# EAGLE board 00A-050 (EAGLE 6.3)
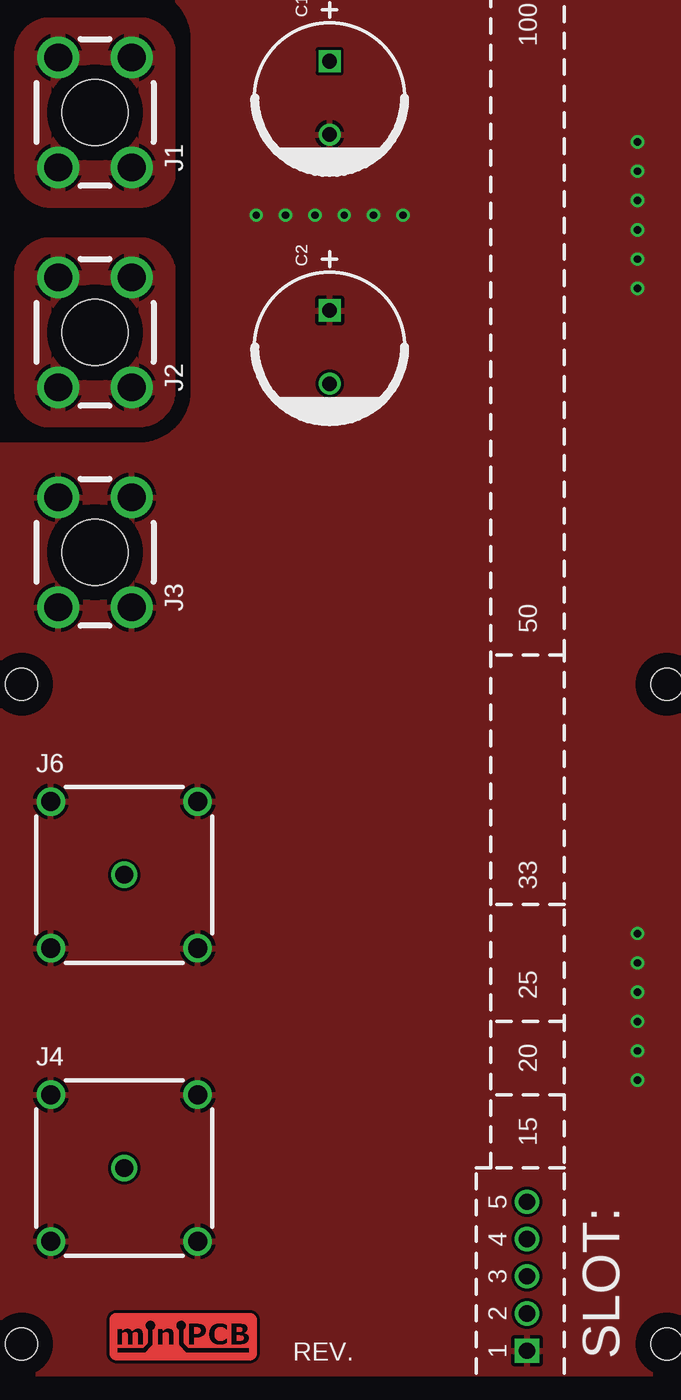
[diagram p0: board, top side]
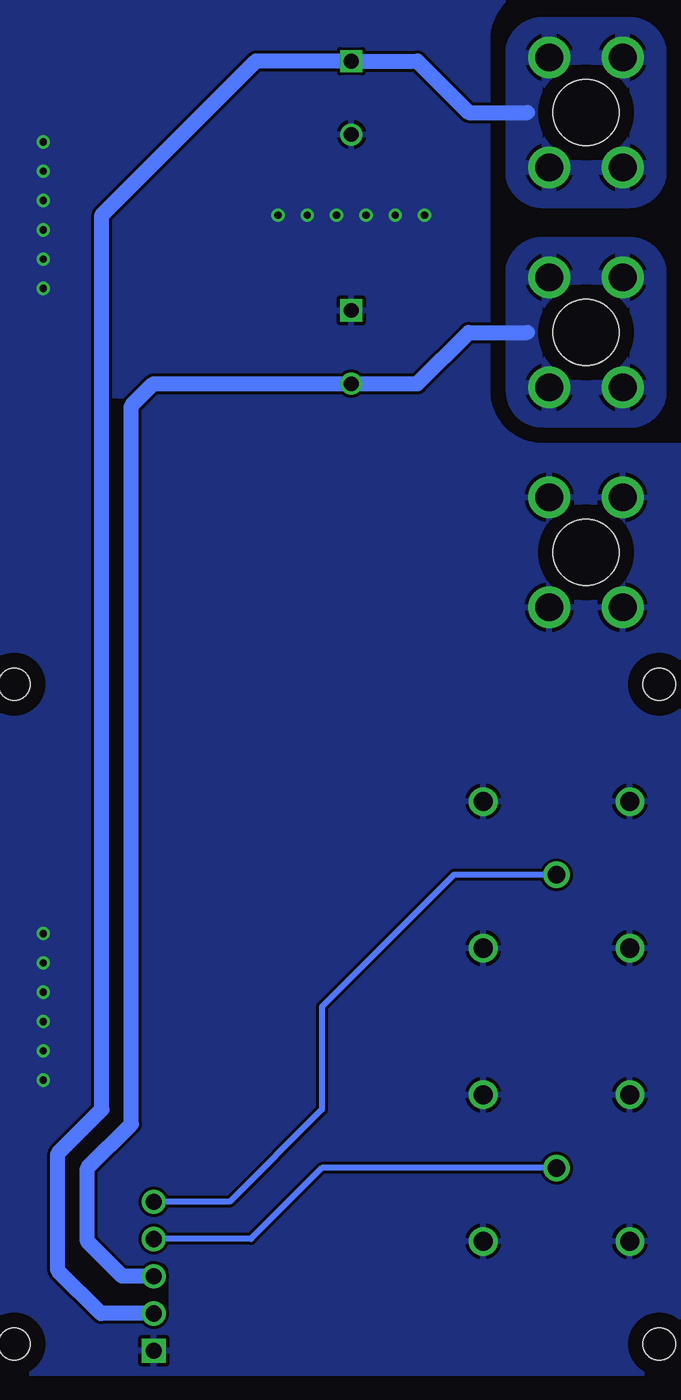
[diagram p1: board, bottom side, seen from below]

No outline drawn. Coordinates in mm, seen from the top.
Copper layers (1*16): Top 0.035mm / dielectric 1.5mm / Bottom 0.035mm
Design rules "default": minimum track width 10mil, minimum drill 24mil, track to track 8mil, track to pad 8mil, pad to pad 8mil, via to via 8mil, smd to smd 8mil, copper to edge 40mil, drill to drill 8mil, minimum pad ring 10mil, minimum via ring 8mil, stop-mask expansion 4mil, vias tented up to drill 0mil, thermal gap 10mil
Holes 4.5 mm at 8,87 8,72 8,57
tRestrict: 5 lines
bRestrict: 7 lines

## Footprints (pad centres in the part's own frame; a part is rotated, then mirrored left to right if it is on the bottom)
C5MM = drill 1 square: + -2.5,0 | drill 1: - 2.5,0
SCREW-TERMINAL-M3 = drill 1.9: 1 -2.5,3.75; 2 2.5,3.75; 3 -2.5,-3.75; 4 2.5,-3.75
B35N14H = drill 1.2: 1.SIG 0,0 | drill 1.3: 2.GND 5,5; 3.GND 5,-5; 4.GND -5,-5; 5.GND -5,5
MINIPCB_DOCK_5P = drill 1.1 square: 1 2.54,2.54 | drill 1.1: 2 5.08,2.54; 3 7.62,2.54; 4 10.16,2.54; 5 12.7,2.54
MINIPCB_DOCK_50X100 = hole 2.2: 3,97; 3,48; 3,3; 47,3; 47,48; 47,97

## Placement (x,y rotation side)
C1  [C5MM]  24,88 270 top
C2  [C5MM]  24,71 270 top
J1  +V  [SCREW-TERMINAL-M3]  8,87 0 top
J2  -V  [SCREW-TERMINAL-M3]  8,72 0 top
J3  GND  [SCREW-TERMINAL-M3]  8,57 0 top
J4  IN.A  [B35N14H]  10,15 0 top
J5  SLOT: A  [MINIPCB_DOCK_5P]  40,0 90 top
J6  OUT.A  [B35N14H]  10,35 0 top
PCB  [MINIPCB_DOCK_50X100]  0,0 0 top

## Library data of the parts
C1 C2 J1-J4 J6 = minipcb
J5 = minipcb; SLOT: A
PCB = minipcb; PART_NUMBER: 00A-050; REVISION: A

## Nets
GND: C1.- C2.+ J3.1 J3.2 J3.3 J3.4 J4.2.GND J4.3.GND J4.4.GND J4.5.GND J5.1 J6.2.GND J6.3.GND J6.4.GND J6.5.GND
N$1: J4.1.SIG J5.4
N$2: J5.5 J6.1.SIG
V+: C1.+ J1.1 J1.2 J1.3 J1.4 J5.2
V-: C2.- J2.1 J2.2 J2.3 J2.4 J5.3

## Tracks (layer width: path | path; a pad name or v marks a point on that pad's centre or on a via)
GND  (via drill 0.5)
  other vias: 19,80 21,80 23,80 25,80 27,80 29,80 45,75 45,77 45,79 45,81 45,83 45,85 45,21 45,23 45,25 45,27 45,29 45,31
  pour Bottom: 1,1 49,1 49,99 1,99
  pour Top: 1,1 49,1 49,99 1,99
N$1
  Bottom 0.406: J4.1.SIG 26,15 30.84,10.16 J5.4
N$2
  Bottom 0.406: J6.1.SIG 17,35 26,26 26,19 32.3,12.7 J5.5
V+
  Bottom 1.016: J5.2 41.08,5.08 44,8 44,16 41,19 41,80 30.5,90.5 C1.+ 19.5,90.5 16,87 12,87
  pour Bottom: 5,93 11,93 arc-90 13,91 13,83 arc-90 11,81 5,81 arc-90 3,83 3,91 arc-90
  pour Top: 5,93 11,93 arc-90 13,91 13,83 arc-90 11,81 5,81 arc-90 3,83 3,91 arc-90
V-
  Bottom 1.016: J5.3 39.62,7.62 42,10 42,15 39,18 39,67 37.5,68.5 C2.- 19.5,68.5 16,72 12,72
  pour Bottom: 5,78 11,78 arc-90 13,76 13,68 arc-90 11,66 5,66 arc-90 3,68 3,76 arc-90
  pour Top: 5,78 11,78 arc-90 13,76 13,68 arc-90 11,66 5,66 arc-90 3,68 3,76 arc-90

## Text on the board
_tNames: C1 | J1 | C2 | J2 | J3 | J6 | J4